# Altium PCB buck1.PcbDoc
Units mil, origin at the board's own origin, x right, y up, seen from the top; angles counter-clockwise.
Board outline 6000 x 4000 mil, 2 copper layers (Top Layer, Bottom Layer); 34 components, 18 nets, 87 pads, 40 vias.
Unrouted connection lines stored in the file: 3.
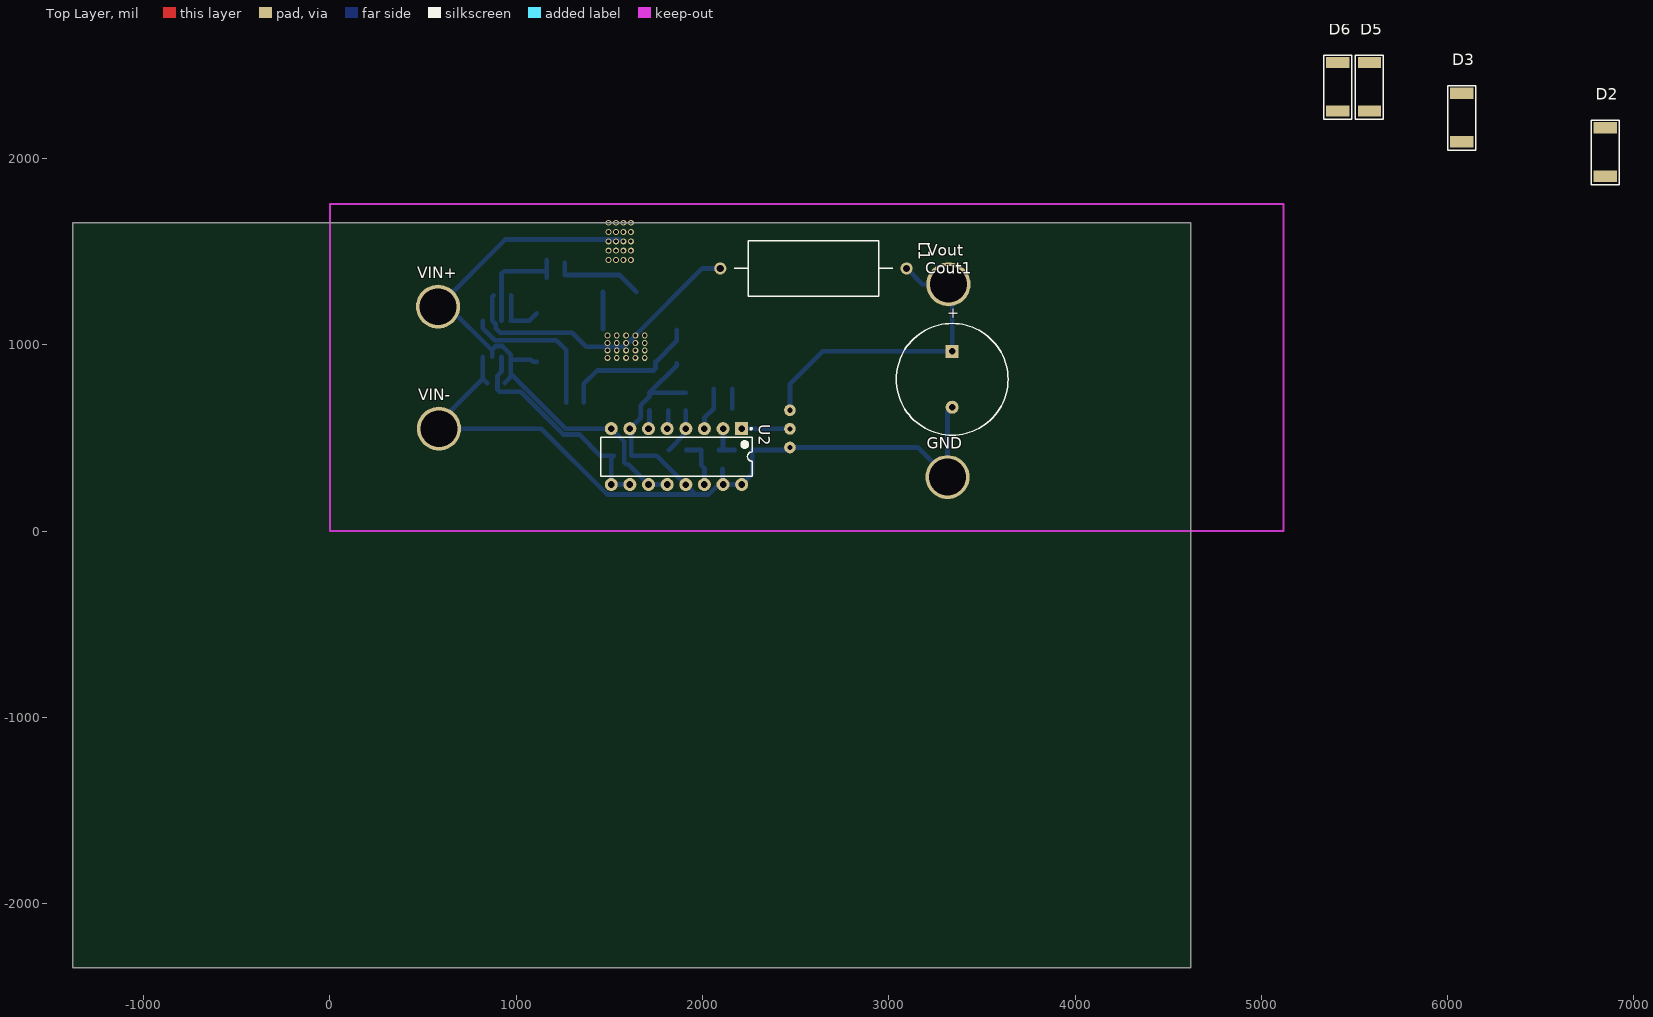
[diagram p0: Top Layer view]
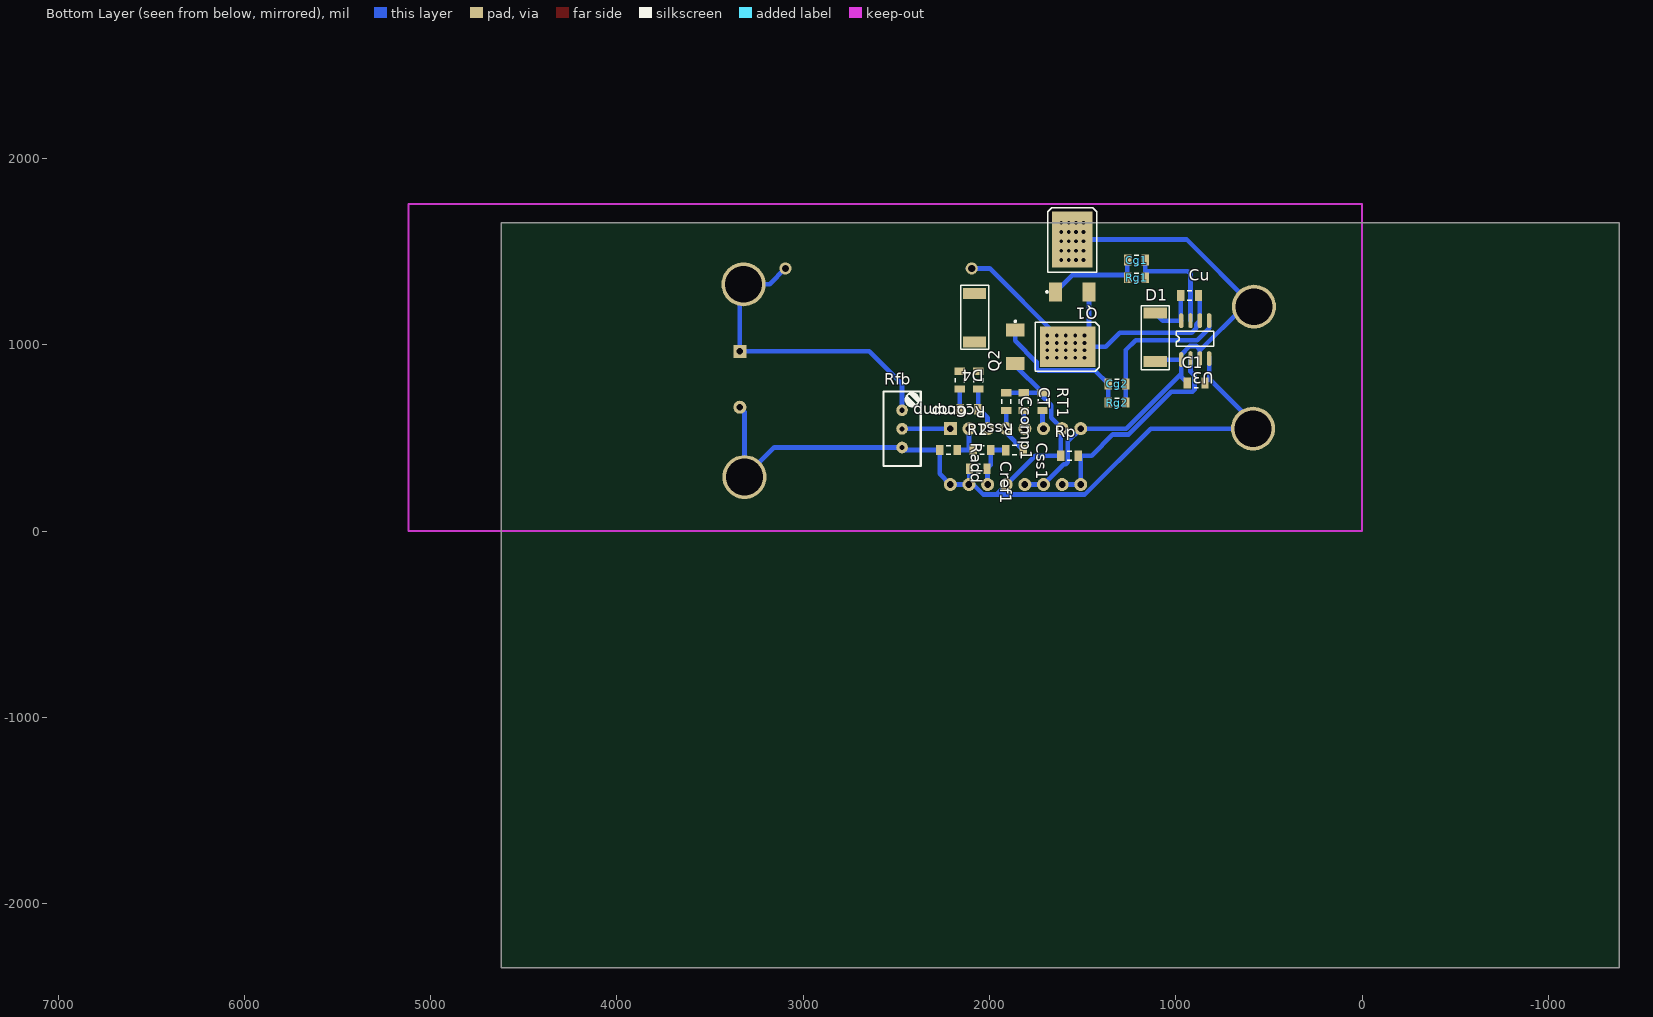
[diagram p1: Bottom Layer view, seen from below]

## Layer stack, top to bottom
Top Layer: signal copper 1.4
Dielectric: dielectric 12.6, FR-4, Dk 4.8
Bottom Layer: signal copper 1.4

## Board outline
-1380,-2345 4620,-2345 4620,1655 -1380,1655

## Design rules (kind name [scope] priority, off if disabled: settings)
Clearance [All] p1: gap=6
PolygonConnect [All] p1: connectstyle=Relief reliefconductorwidth=10 reliefentries=4 polygonreliefangle="90 Angle" airgapwidth=10
RoutingVias [All] p1: holewidth=28 width=50 viastyle="Through Hole" minholewidth=28 minwidth=50 maxholewidth=28 maxwidth=50
SolderMaskExpansion [All] p1: expansion=4
Width [All] p1: maxlimit=60 minlimit=17 preferedwidth=20 minimp=50.000000 maximp=50.000000 favimp=50.000000
28 further rules are at their usual default settings.

## Components (designator, comment, footprint, x,y, rotation, side; value= is the part's Value field where it differs from the comment)
C1 "Cap" C2012 890,795 r180 bottom
Ccomp "22nF" C2012 2160,810 r270 bottom
Ccomp1 "Cap" C2012 2110,655 r180 bottom
Cg1 "Cap" C2012 1210,1455 r0 bottom
Cg2 "Cap" C2012 1315,790 r180 bottom
Cout1 "Cap2" RB7.6-15 3340,815 r90 top
Cref1 "0.1uF" C2012 2060,335 r180 bottom
Css1 "3.3uF" C2012 1865,435 r180 bottom
CT "1nF" C2012 1815,695 r270 bottom
Cu "Cap" C2012 925,1265 r0 bottom
D1 "D Schottky" SK54 1110,1040 r90 bottom
D2 "Diode 1N4004" SK54 6845,2035 r90 top
D3 "Diode 1N4004" sk54 6075,2220 r90 top
D4 "Diode 1N4004" SK54 2080,1145 r270 bottom
D5 "Diode 1N4004" sk54 5580,2385 r90 top
D6 "Diode 1N4004" sk54 5410,2385 r90 top
GND "PIN" PIN 3315,290 r0 top
L1 "Inductor" AXIAL-1.0 2595,1410 r0 top
Q1 "MOSFET-N" nmos 1560,1480 r270 bottom
Q2 "MOSFET-N" nmos 1665,995 r0 bottom
R2 "5.1K" R2012 2040,435 r180 bottom
Radd "Res" R2012 2220,435 r180 bottom
Rcomp "51K" R2012 2060,810 r270 bottom
Rfb "100k" pot（长方形） 2480,450 r90 bottom
Rg1 "Res1" R2012 1210,1360 r0 bottom
Rg2 "Res1" R2012 1315,690 r180 bottom
Rp "Res1" R2012 1570,405 r180 bottom
Rss1 "10K" R2012 1910,695 r270 bottom
RT1 "Res" R2012 1715,695 r270 bottom
U2 "TL494" DIP-16 1860,400 r270 top
U3 "IR2104S" ir2104 880,1030 r0 bottom
VIN+ "PIN" PIN 580,1205 r0 top
VIN- "PIN" PIN 585,550 r0 top
Vout "PIN" PIN 3320,1325 r0 top

## Footprints (in the part's own frame and the unit in brackets; to place one, negate y for a bottom-side part, rotate by r counter-clockwise, add the part's x,y. Pads: shape width x height; smd on the part's side, far side on the other; paste and mask are expansions set on the pad)
AXIAL-1.0 [mm] "Axial Device, Thru-Hole; 2 Leads; 1.0 in Pin Spacing"
  round 1.65 hole 1: 1(-12.7,0) 2(12.7,0)
  silkscreen extent -10.79,-3.81 10.79,3.81
C2012 [mm] "Chip Capacitor, 2-Leads, Body 2.0x1.2mm, IPC Low Density"
  rect 1x1.45 smd: 1(-1.2,0) 2(1.2,0)
  silkscreen extent -0.3,-0.63 0.3,0.63, body extent -0.98,-0.6 1.02,0.6, height 0.5
DIP-16 [mil] "DIP; 16 Leads; Row Spacing 7.62 mm; Pitch 2.54 mm"
  rect 70x70 hole 35.43: 1(-150,350)
  round 70 hole 35.43: 2(-150,250) 3(-150,150) 4(-150,50) 5(-150,-50) 6(-150,-150) 7(-150,-250) 8(-150,-350) 9(150,-350) 10(150,-250) 11(150,-150) 12(150,-50) 14(150,150) 15(150,250) 16(150,350)
  round 70 hole 35: 13(150,50)
  silkscreen extent -155,-406 104,406, body extent -142,-405 142,405, height 200
ir2104 [mil]
  oval 23.62x80 smd: 1(90.47,109.24) 2(40.47,104.24) 3(-9.53,104.24) 4(-59.53,104.24) 5(-59.53,-99.76) 6(-9.53,-99.76) 7(40.47,-99.76) 8(90.47,-99.76)
  silkscreen extent -83,-43 116,37
nmos [mil]
  rect 100x70 smd: 1(196.22,-84.76) 3(196.22,94.76)
  rect 299.21x218.5 smd: 2(-85.51,5)
  silkscreen extent -256,-136 201,137
PIN [mm]
  round 6 hole 5: 1(0,0)
pot（长方形） [mm]
  round 1.6 hole 0.7: 1(5.055,-0.279) 2(2.515,-0.279) 3(-0.025,-0.279)
  silkscreen extent -2.57,-2.82 7.59,2.26
R2012 [mm] "Chip Resistor, 2-Leads, Body 2.0x1.2mm, IPC Low Density"
  rect 1x1.4 smd: 1(-1.2,0) 2(1.2,0)
  silkscreen extent -0.3,-0.6 0.3,0.6, body extent -0.98,-0.6 1.02,0.6, height 0.5
RB7.6-15 [mil] "Polarized Capacitor (Radial); 2 Leads"
  rect 70x70 hole 35: 1(150,0)
  round 70 hole 35: 2(-150,0)
  silkscreen extent -300,-300 300,300
SK54 [mm]
  rect 1.52x3.18 smd: 1(-3.305,0) 2(3.305,0)
  silkscreen extent -4.44,-1.91 4.32,1.91
sk54 [mm]
  rect 1.52x3.18 smd: 1(-3.305,0) 2(3.305,0)
  silkscreen extent -4.44,-1.91 4.32,1.91

## Part data
C1 Ccomp1 Cg1 Cg2 Cout1 Cu: "Capacitor"
Ccomp Cref1 CT: library part ----Cap, "0.1uF 0805"
Css1: library part "----Cap Pol1", "10uF RAD0.1_"
D1: "Schottky Diode"
D2 D3 D4 D5 D6: "1 Amp General Purpose Rectifier"
Q1 Q2: "N-Channel MOSFET"
R2 Rcomp Rss1: library part ---Res1, "0805_"
Radd RT1: "贴片电阻"
Rfb: library part RPot, "Potentiometer"
Rg1 Rg2 Rp: "Resistor"
U3: "High and Low Side Driver"

## Via types
v1: diameter 31.5, hole 19.68, Top Layer to Bottom Layer, 40 vias

## Nets (pads, with @x,y where several pads share a name; then routed paths per layer and width w, separated by ;. In a path a pad name is that pad's centre, name@x,y a point inside that pad or via, vN(x,y) a via of type N, cw(c..) or ccw(c..) an arc to the next point about the centre after c; other vN are vias at no path point)
5VREF: Ccomp1.1 Ccomp.2 Cref1.2 Css1.1 R2.2 U2.14 | length 377.7
  Bottom Layer w25: Css1.1 R2.2 1992.76,355 2010,337.76 U2.14 ; Ccomp1.1@2160,657.76 Ccomp.2
12V: C1.1 D1.1 D2.2 Q1.2 U2.8 U2.11 U2.12 U3.1 U3.3 VIN+.1 | length 3158.9
  Bottom Layer w25: U3.3@870.47,935.76 870.47,969.53 ; C1.1 970.47,828.23 970.47,860 ; U3.1@970,925 970.03,920.75 970.47,860 ; D1.1 1090,909.88 1079.13,920.76 U3.1 970.47,946.81 923.28,994 890,994 870.47,974.47 870.47,969.53 ; Q1.2 940.51,1565.51 VIN+.1 635,1205 870.47,969.53 ; U2.12 U2.11 1601.06,358.94 1589.9,358.94 1579.06,369.78 1579.06,480.94 U2.8 1265,550 970.47,844.53 970.47,860
  other v1: 1495,1455.51 1535,1455.51 1575,1455.51 1615,1455.51 1495,1505.51 1535,1505.51 1575,1505.51 1615,1505.51 1495,1555.51 1535,1555.51 1575,1555.51 1615,1555.51 1495,1605.51 1535,1605.51 1575,1605.51 1615,1605.51 1495,1655.51 1535,1655.51 1575,1655.51 1615,1655.51
G1: Cg1.1 Rg1.1 U3.7 | length 594
  Bottom Layer w25: U3.7 920.47,1380.47 935,1395 1162.76,1395 ; Rg1.1 1162.76,1395 ; Cg1.1 1162.76,1395
G2: Cg2.2 Rg2.2 U3.5 | length 818.3
  Bottom Layer w25: U3.5 820.47,1089.53 885,1025 1215,1025 1267.76,972.24 Cg2.2 Rg2.2
GND: C1.2 Cout1.2 Cref1.1 CT.1 GND.1 Q2.3 Radd.1 Rfb.3 Rp.1 Rss1.1 RT1.1 U2.7 U2.13 U2.15 U2.16 U3.4 VIN-.1 | length 5337.9
  Bottom Layer w25: U3.4@820.47,935.76 820.47,817.28 ; C1.2 820.47,817.28 ; Q2.3 1861.22,888.46 RT1.1 ; Rss1.1 CT.1 RT1.1 ; Cref1.1 2107.24,252.76 U2.15 ; Cout1.2 3315,640 GND.1 3156,449 Rfb.3 2455,435 Radd.1 2267.24,307.24 U2.16 U2.15 ; 820.47,817.28 585,581.81 VIN-.1 1134.34,550 1487.84,196.5 1963.5,196.5 ; RT1.1 1715,721.16 1668.94,675.1 1668.94,608.94 U2.7 1617.24,542.76 Rp.1 1755,405 U2.13 1963.5,196.5 ; 1963.5,196.5 2032.16,196.5 2085.66,250 U2.15
NetCcomp1_2: Ccomp1.2 Rcomp.2 U2.3 | length 233.5
  Bottom Layer w25: U2.3 2010,607.76 2060,657.76 Rcomp.2
NetCcomp_1: Ccomp.1 Rcomp.1
NetCg1_2: Cg1.2 Q1.1 Rg1.2 | length 475.3
  Bottom Layer w25: Rg1.2@1260,1375 Cg1.2@1260,1440 ; Rg1.2@1272.24,1375 1553.54,1375 Q1.1
NetCg2_1: Cg2.1 Q2.1 Rg2.1 | length 773.5
  Bottom Layer w25: Rg2.1 Cg2.1 1434.49,862.25 1736.76,862.25 1747.59,873.09 1747.59,907.59 1861.22,1021.22 Q2.1
NetCout1_1: Cout1.1 L1.2 Rfb.1 Vout.1 | length 1712.4
  Bottom Layer w25: Rfb.1 2469,789 2645,965 Cout1.1 3340,1305 Vout.1 3180,1325 L1.2
NetCss1_2: Css1.2 Rss1.2 U2.4 | length 251
  Bottom Layer w25: Css1.2 1910,527.24 U2.4 Rss1.2
NetCT_2: CT.2 U2.5 | length 92.8
  Bottom Layer w25: U2.5@1815,555 CT.2
NetCu_2: Cu.2 D1.2 U3.8 | length 289.7
  Bottom Layer w25: U3.8 1069.64,1129.76 D1.2 ; U3.8@972.24,1131.53 Cu.2
NetR2_1: R2.1 Radd.2 U2.2 | length 202.6
  Bottom Layer w25: R2.1 2115,435 ; U2.2 2110,440 2115,435 ; Radd.2 2115,435
NetRfb_2: Rfb.2 U2.1 | length 259.4
  Bottom Layer w25: U2.1 2468,550 Rfb.2
NetRT1_2: RT1.2 U2.6 | length 92.8
  Bottom Layer w25: U2.6@1715,555 RT1.2
PWM: Rp.2 U2.9 U2.10 U3.2 | length 1216.4
  Bottom Layer w25: U3.2@920.47,935.76 920.47,855 899.06,833.59 899.06,758.79 909.9,747.96 1023.2,747.96 1252.16,519 1337.23,519 1451.23,405 Rp.2 1510,392.24 U2.9 U2.10
VS: Cu.1 L1.1 Q1.3 Q2.2 U3.6 | length 1826.5
  Bottom Layer w25: Cu.1 870.47,1257.72 U3.6 890.16,1110.07 890.16,1089.01 914.17,1065 1300,1065 1375,990 Q2.2 v1(1639.49,1050) 1999.49,1410 L1.1@2115,1410 ; Q2.2@1465.24,1084.25 Q1.3
  other v1: 1489.49,930 1539.49,930 1589.49,930 1639.49,930 1689.49,930 1489.49,970 1539.49,970 1589.49,970 1639.49,970 1689.49,970 1489.49,1010 1539.49,1010 1589.49,1010 1639.49,1010 1689.49,1010 1489.49,1050 1539.49,1050 1589.49,1050 1689.49,1050
pads on no net: D2.1 D3.1 D3.2 D4.1 D4.2 D5.1 D5.2 D6.1 D6.2

## Keep-outs
Keep-Out Layer:
  lines w10: 0,0 0,1755 5118.11,1755 5118.11,0 0,0

## Text inside footprints (layer, text, board x,y; h text height)
Cout1: Top Overlay "+" at 3369.01,1135.15 h59.06 r90